# Altium PCB gainblock.PcbDoc
Units mil, origin at the board's own origin, x right, y up, seen from the top; angles counter-clockwise.
Board outline 1600.03 x 1875.03 mil, 2 copper layers (Top Layer, Bottom Layer); 15 components, 7 nets, 35 pads, 173 vias.
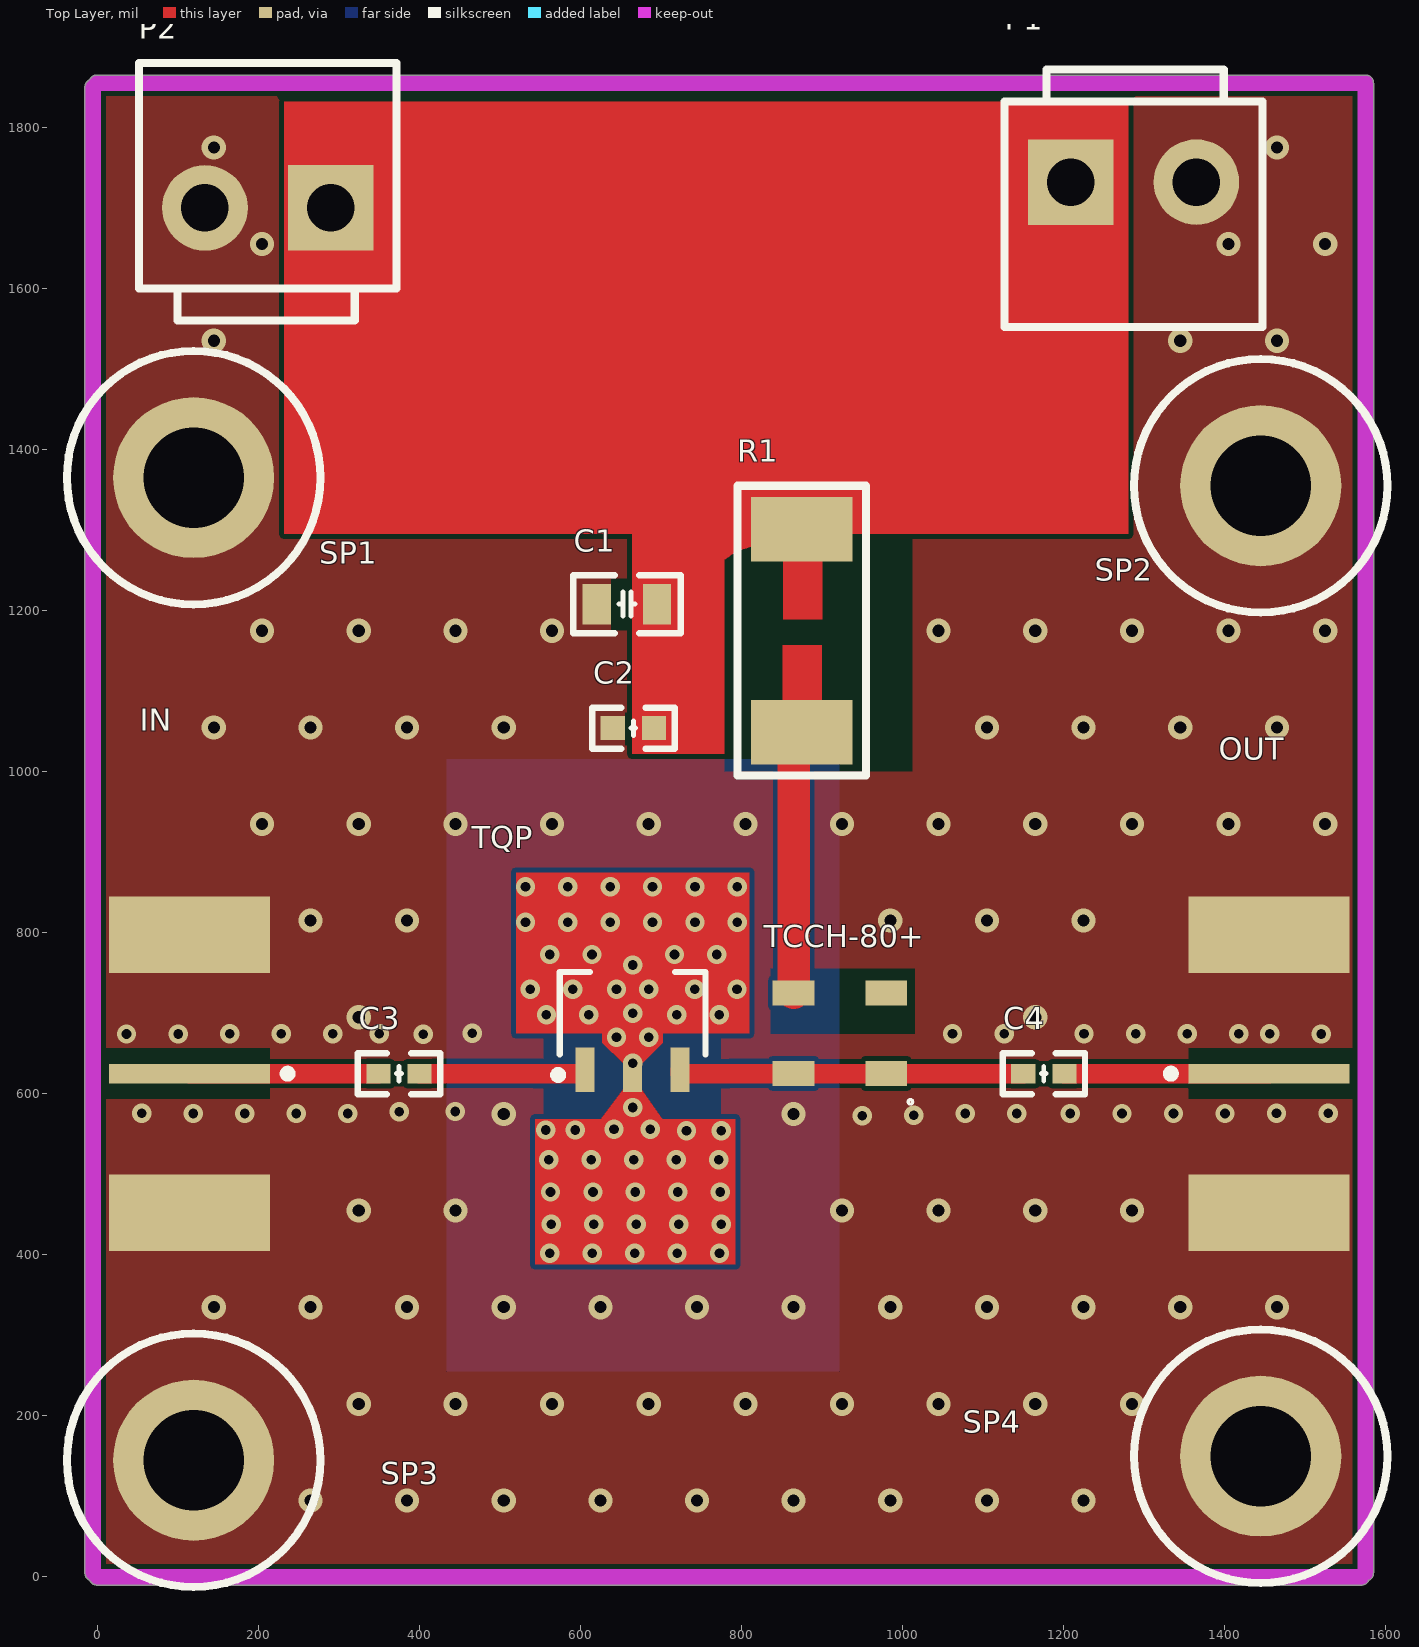
[diagram p0: Top Layer view]
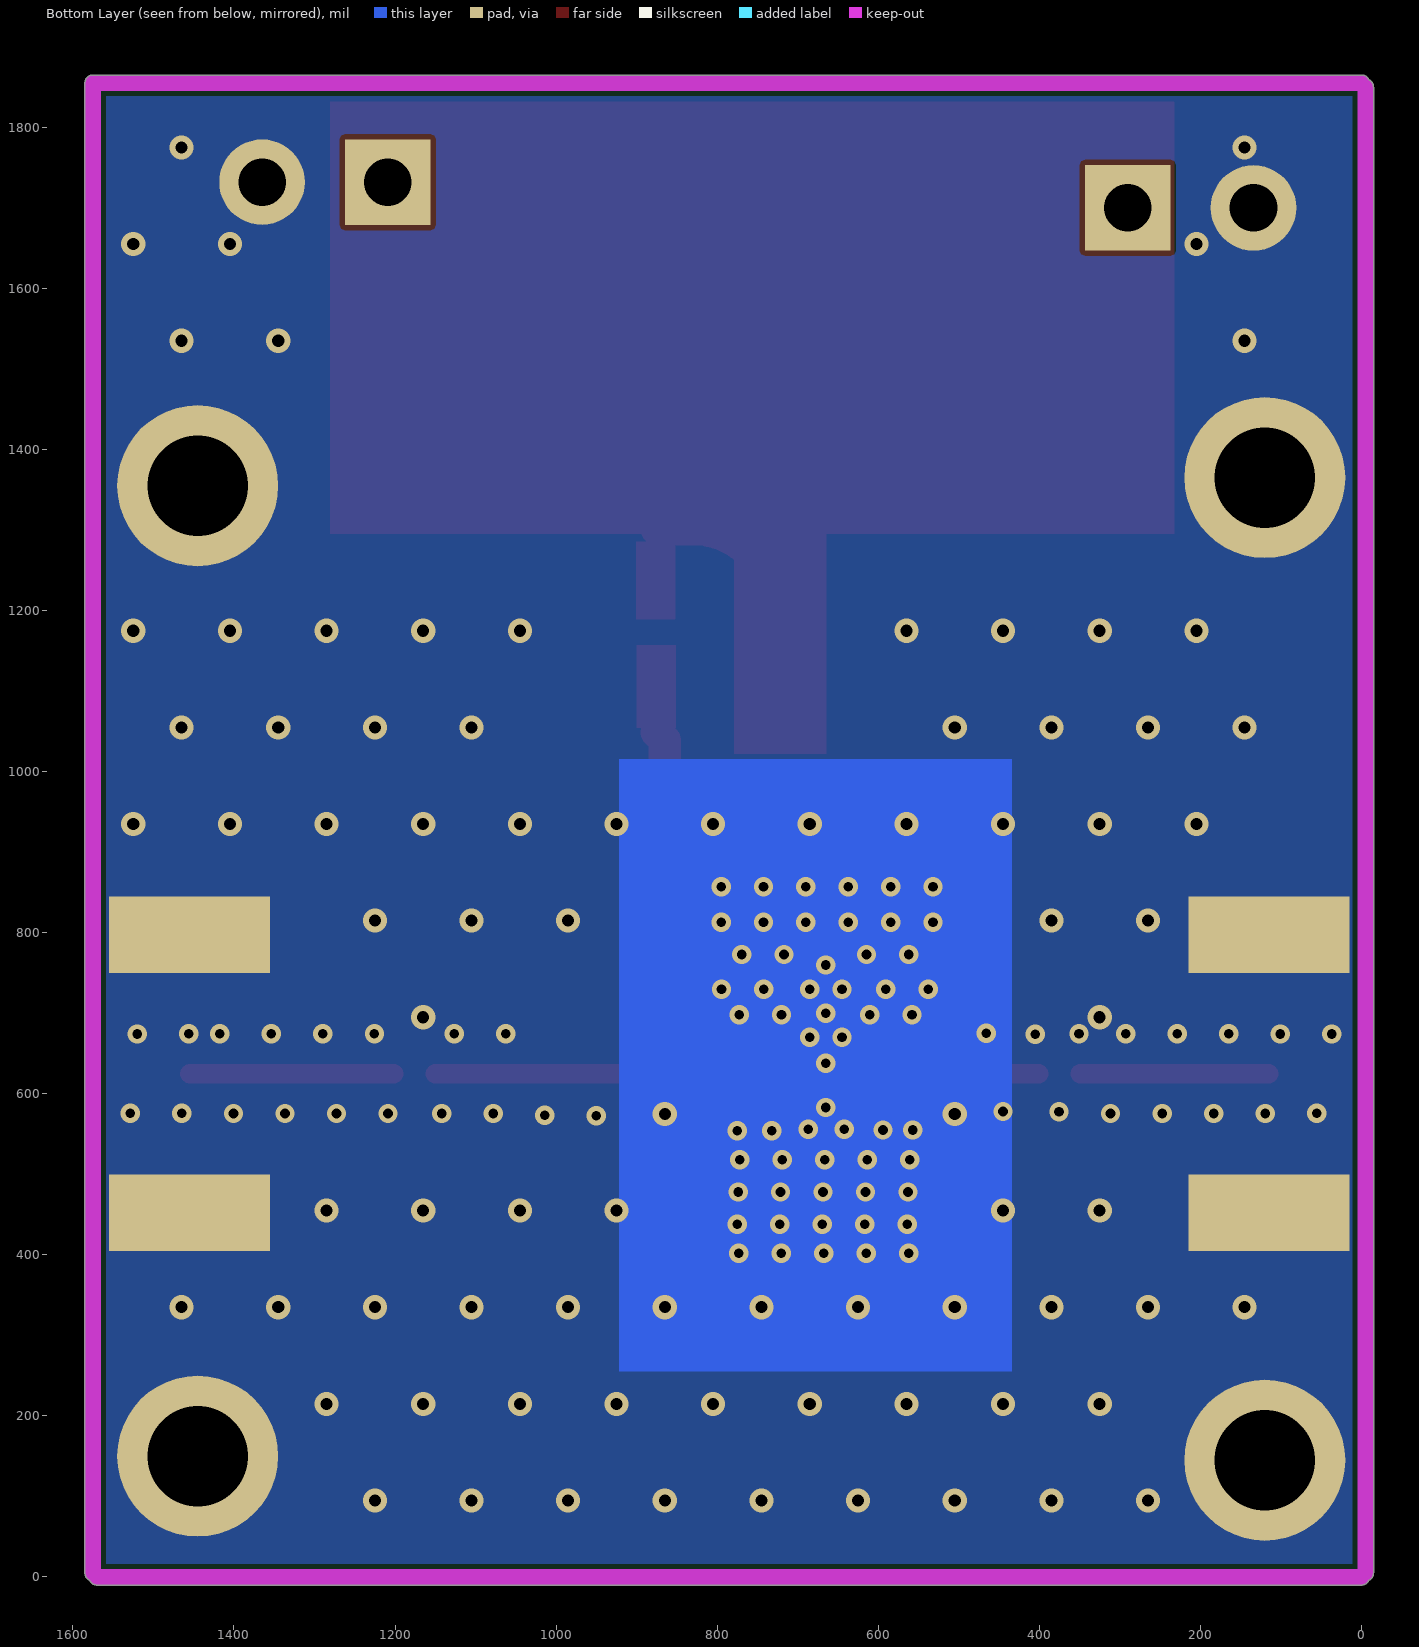
[diagram p1: Bottom Layer view, seen from below]
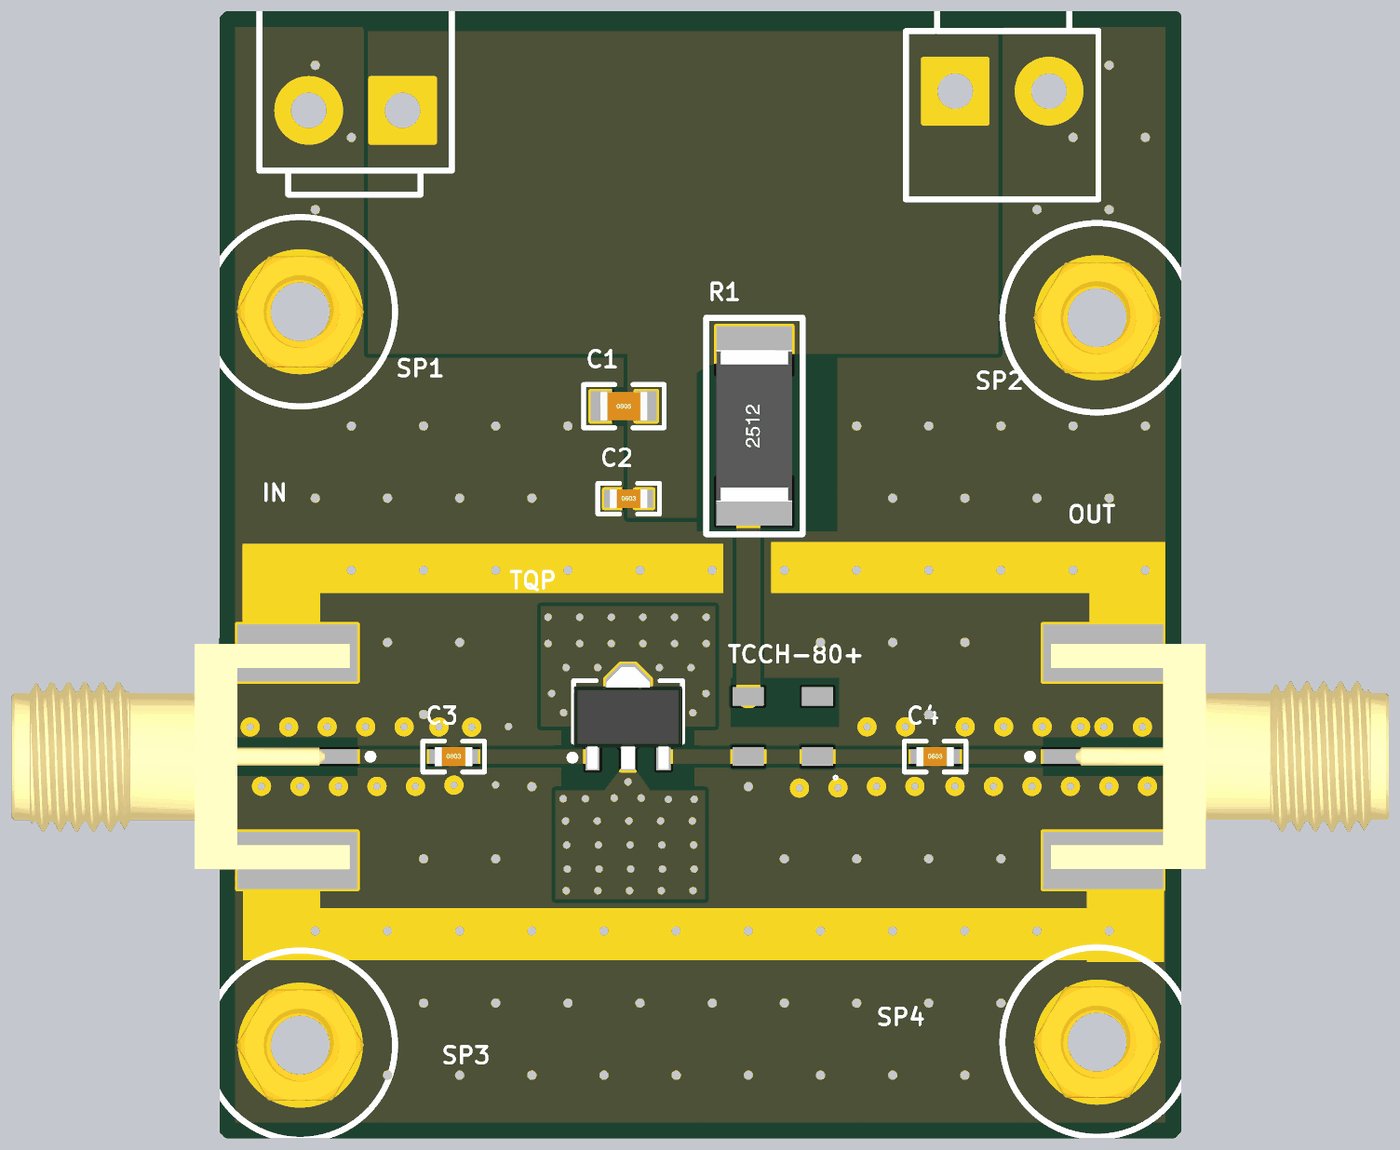
[diagram p2: 3D render of the assembled board from above, using the file's embedded part models]

## Layer stack, top to bottom
Top Solder: solder mask 0.4, Solder Resist, Dk 3.5
Top Layer: signal copper 1.4
Dielectric 1: dielectric 12.6, FR-4, Dk 4.8
Bottom Layer: signal copper 1.4
Bottom Solder: solder mask 0.4, Solder Resist, Dk 3.5

## Board outline
-9.13,-4.13 cw(c-5,5) -15.02,5 -15.02,1850 cw(c-5,1850) -9.13,1859.13 cw(c0,1855) 0,1865.01 1575,1865.01 cw(c1575,1855) 1585.01,1855 1585.01,5 cw(c1575,5) 1579.13,-4.13 cw(c1570,0) 1570,-10.01 0,-10.01 cw(c0,0)

## Design rules (kind name [scope] priority, off if disabled: settings)
Clearance [All] p1: gap=6 ignorepadtopadclearanceinfootprint=FALSE
PolygonConnect [All] p1: connectstyle=Direct reliefconductorwidth=10 reliefentries=4 polygonreliefangle="90 Angle" airgapwidth=10
RoutingVias [All] p1: holewidth=28 width=50 viastyle="Through Hole" minholewidth=28 minwidth=50 maxholewidth=28 maxwidth=50
SolderMaskExpansion [All] p1: expansion=4
Width [All] p1: maxlimit=100 minlimit=10 preferedwidth=10
30 further rules are at their usual default settings.

## Components (designator, comment, footprint, x,y, rotation, side; value= is the part's Value field where it differs from the comment)
C1 "104" "C 0805_L" 658,1208 r0 top
C2 "104" "C 0603_L"#1 666,1054 r0 top
C3 "104" "C 0603_L"#2 375,625 r0 top
C4 "104" "C 0603_L"#2 1175.59,625 r0 top
IN "142-0701-801" CINC-142-0701-801_V 115,625 r180 top
OUT "142-0701-801" CINC-142-0701-801_V 1455,624.99 r0 top
P1 "HDR-1X2" VH3.96-LI-2P 1287,1732 r0 top
P2 "HDR-1X2" VH3.96-LI-2P 212.05,1700 r180 top
R1 "1K" "R 2512_M" 875,1175 r90 top
SP1 "M3铜柱" M3x4_L 120,1365 r0 top
SP2 "M3铜柱" M3x4_L 1445,1355 r0 top
SP3 "M3铜柱" M3x4_L 120,145 r0 top
SP4 "M3铜柱" M3x4_L 1445,150 r0 top
TCCH-80+ "TCCH-80+" DFN3127P600-8N 840,740 r270 top
TQP "*TQP369182" "SOT89- TQP369182" 605.94,629.84 r90 top (schematic designator *TQP369182)

## Footprints (in the part's own frame and the unit in brackets; to place one, negate y for a bottom-side part, rotate by r counter-clockwise, add the part's x,y. Pads: shape width x height; smd on the part's side, far side on the other; paste and mask are expansions set on the pad)
"C 0603_L"#1 [mil] "无极性贴片电容"
  rect 30x30 smd: 1(-25.59,0) 2(25.59,0)
  silkscreen extent -51,-26 51,26, body extent -31,-16 31,16, height 32
"C 0603_L"#2 [mil] "无极性贴片电容"
  rect 30x24 smd: 1(-25.59,0) 2(25.59,0)
  silkscreen extent -51,-26 51,26, body extent -31,-16 31,16, height 32
"C 0805_L" [mil] "无极性贴片电容"
  rect 35x50 smd: 1(-37.4,0) 2(37.4,0)
  silkscreen extent -67,-36 67,36, body extent -39,-24 39,24, height 20
CINC-142-0701-801_V [mil] "SMA Connector, 5-Leads, Body 14.275x9.525mm"
  rect 200x24 smd: 1(0,0)
  rect 200x95 smd: 2(0,172.5) 3(0,-172.5)
  rect 200x95 smd far side: 4(0,172.5) 5(0,-172.5)
  silkscreen extent -127,-5 -117,5, body extent -87,-187 475,188, height 171
DFN3127P600-8N [mm]
  rect 0.79x1.32 smd: 1(2.921,3.556) 2(0.381,3.556) 3(0.381,0.635) 4(2.921,0.635)
  silkscreen extent 3.74,4.25 3.88,4.39, body extent -0.17,0.21 3.72,4.1, height 3.81
M3x4_L [mil] "M3铜柱，长：4mm"
  round 200 hole 125: 1(0,0)
  silkscreen extent -157,-157 157,157, body extent -106,-93 106,93, height 159
"R 2512_M" [mm] "1W贴片电阻"
  rect 2.032x3.2 smd: 1(-3.2,0) 2(3.2,0)
  silkscreen extent -4.57,-2.03 4.57,2.03, body extent -3.2,-1.6 3.2,1.6, height 0.55
"SOT89- TQP369182" [mm] "SOT89, TQP369182"
  rect 1.4x0.6 smd: 1(0,0) 3(0,-3)
  rect 0.9x0.6 smd: 2(-0.25,-1.5)
  Top Layer region: 0.2,-1.2 0.85,-0.55 3.15,-0.55 3.8,-1.2 3.8,-1.8 3.15,-2.45 0.85,-2.45 0.2,-1.8
  silkscreen extent -0.29,-3.8 3.08,0.97, body extent -0.65,-3.8 3.65,0.8, height 1.6
VH3.96-LI-2P [mm] "接插件，25V/5A"
  rect 2.7x2.7 hole 1.5: 1(-1.98,0)
  round 2.7 hole 1.5: 2(1.982,0)
  silkscreen extent -4.06,-4.57 4.07,3.56, body extent -3.98,-4.4 4.03,4.16, height 10.5

## Part data
C1 C2 C3 C4: library part C, "无极性贴片电容", BOM名称=无极性贴片电容, 学习资源=www.ooocke.com, 版权归属=源创客
IN OUT: library part CMP-2000-05490-1, "SMA End Launch Jack Receptacle, 50 Ohm, 0 to 18 GHz, -65 to 165 degC, 5-Pin SMD, RoHS, Bulk", Manufacturer=EmersonConnectivitySolutions, Maximum Frequency=18GHz, Operating Temperature Range=-65Cto+165C, Package Description="5-Pin Surface Mount Device, Body 14.275 x 9.525 mm", Body Material=Brass, Body Style=Straight, Brand=Johnson/EmersonConnectivitySolutions, Connector Type=JackPCB, Contact Plating=Gold, Datasheet URL=https://belfuse.com/resources/Johnson/productinformation/pi-142-0701-801.pdf, Datasheet Version=12/2014, Factory Pack Quantity=5, Gender=Jack(Female), Impedance=50Ohms, Manufacturer URL=http://www.cinch.com/, Mounting Technology=SurfaceMount, Orientation=Straight, Package Reference=142-0701-801, Package URL=https://belfuse.com/resources/Johnson/drawings/dr-1420701801.pdf, Product=Connectors, Product Category=RFConnectors/CoaxialConnectors, RF Series=SMA, RoHS=Details, Series=SMA, Termination Style=Solder
P1 P2: library part "Header 2", "2P接插件", BOM名称=2P接插件, 学习资源=www.ooocke.com, 版权归属=源创客
R1: library part R, "贴片电阻", BOM名称=贴片电阻, 学习资源=www.ooocke.com, 版权归属=源创客
SP1 SP2 SP3 SP4: library part 铜柱小焊盘, "铜柱", BOM名称=铜柱, 学习资源=www.ooocke.com, 版权归属=源创客
TCCH-80+: library part Component_1
TQP: library part TQP369182, "TQP369182"

## Via types
v1: diameter 30, hole 15, Top Layer to Bottom Layer, tented both sides, 82 vias
v2: diameter 24, hole 12, Top Layer to Bottom Layer, tented both sides, 60 vias
v3: diameter 24, hole 12, Top Layer to Bottom Layer, 31 vias

## Nets (pads, with @x,y where several pads share a name; then routed paths per layer and width w, separated by ;. In a path a pad name is that pad's centre, name@x,y a point inside that pad or via, vN(x,y) a via of type N, cw(c..) or ccw(c..) an arc to the next point about the centre after c; other vN are vias at no path point)
GND: C1.1 C2.1 IN.2 IN.3 IN.4 IN.5 OUT.2 OUT.3 OUT.4 OUT.5 P1.2 P2.2 SP1.1 SP2.1 SP3.1 SP4.1 TQP.2
  other v1: 265,95 385,95 505,95 625,95 745,95 865,95 985,95 1105,95 1225,95 325,215 445,215 565,215 685,215 805,215 925,215 1045,215 1165,215 1285,215 145,335 265,335 385,335 505,335 625,335 745,335 865,335 985,335 1105,335 1225,335 1345,335 1465,335 325,455 445,455 925,455 1045,455 1165,455 1285,455 505,575 865,575 325,695 1165,695 265,815 385,815 985,815 1105,815 1225,815 205,935 325,935 445,935 565,935 685,935 805,935 925,935 1045,935 1165,935 1285,935 1405,935 1525,935 145,1055 265,1055 385,1055 505,1055 1105,1055 1225,1055 1345,1055 1465,1055 205,1175 325,1175 445,1175 565,1175 1045,1175 1165,1175 1285,1175 1405,1175 1525,1175 145,1535 1345,1535 1465,1535 205,1655 1405,1655 1525,1655 145,1775 1465,1775
  other v2: 562,402 614.75,402 667.5,402 720.25,402 773,402 564,438 616.75,438 669.5,438 722.25,438 775,438 563,478 615.75,478 668.5,478 721.25,478 774,478 561,518 613.75,518 666.5,518 719.25,518 772,518 732,554 775,554 557,555 594,555 642,556 686.84,556 445,578 665,583 665,637.72 645,670 685,670 466,675 558,698 610.6,698 720,698 772.6,698 665,700 538,730 590.6,730 645,730 685,730 742,730 794.6,730 665,760 562,773 614.6,773 717,773 769.6,773 532,813 584.6,813 637.2,813 689.8,813 742.4,813 795,813 532,857 584.6,857 637.2,857 689.8,857 742.4,857 795,857
  other v3: 950.04,572.65 1014.04,573.19 119.49,575.44 183.49,575.44 247.49,575.44 311.49,575.44 1078,575.45 1142,575.45 1208.61,575.45 1272.61,575.45 1336.61,575.45 1400.61,575.45 55.49,575.68 1464.61,575.67 1528.61,575.67 375.46,577.53 36.65,674.32 100.65,674.32 350.61,674.39 405,674 1456.21,674.39 1520.21,674.31 164.65,674.55 228.65,674.55 292.65,674.55 1062.33,674.55 1126.33,674.55 1225.57,674.55 1289.57,674.55 1353.57,674.55 1417.57,674.55
Net*TQP369182_1: C3.2 TQP.1 | length 175.4
  Top Layer w24: C3.2 576,625
Net*TQP369182_3: C4.1 TCCH-80+.1 TCCH-80+.4 TQP.3 | length 430.8
  Top Layer w24: TQP.3 724.06,625 TCCH-80+.4 TCCH-80+.1 C4.1
NetC3_1: C3.1 IN.1 | length 234.4
  Top Layer w24: IN.1 C3.1
NetC4_2: C4.2 OUT.1 | length 253.8
  Top Layer w24: C4.2 OUT.1
NetR1_1: R1.1 TCCH-80+.3 | length 328.2
  Top Layer w40: TCCH-80+.3 865,1039.03 R1.1
VCC: C1.2 C2.2 P1.1 P2.1 R1.2 | length 368.8
  Top Layer w40: C2.2 691.59,1198.8 cw(c704.6,1198.8) C1.2 759.1,1271.7 cw(c829.81,1200.98) 829.81,1300.98 R1.2
pads on no net: TCCH-80+.2

## Polygon pours and split planes (outlines as drawn)
GND on Bottom Layer "Top Layer-GND" (solid, pour order 2): -5,1850 1575,1850 1575,5 0,5 0,0
GND on Top Layer "Top Layer-GND" (solid, pour order 6): -5,1850 -5,5 1575,5 1575,1849 1569,1849

## Keep-outs
Keep-Out Layer:
  lines w20: -5,5 0,0 1570,0 1575,5 1575,1855 0,1855 -5,1850 -5,5

## Other copper
Top Layer:
  rectangle net NetR1_1: 851,1054 900,1157
  rectangle net VCC: 852,1189 901,1286
  rectangle net VCC: 664,1022 779,1372
  rectangle net VCC: 232,1295 1281,1832
  rectangle net GND: 544,388 793,569
  rectangle net GND: 636,515 693,575
  region net GND: 675.62,600.62 658.89,613.23 625.27,568.61 642,556
  region net GND: 686.84,553.98 704,566 671.96,611.76 654.79,599.74
  rectangle net GND: 653,547 677,605
  rectangle net Net*TQP369182_3: 731,613 785,637
  rectangle net Net*TQP369182_1: 542,613 595,637
  rectangle net GND: 520,675 810,875
  pour cut-out: 1355,657 1355,593 1559,593 1559,657
  pour cut-out: 11,657 11,593 215,593 215,657
  pour cut-out: 779,1322 1013,1322 1013,1000 779,1000
  pour cut-out: 655,1074 676,1074 676,1032 655,1032
  pour cut-out: 638,1240 670,1240 670,1175 638,1175
  pour cut-out: 1165,641 1187,641 1187,609 1165,609
  pour cut-out: 836,756 1016,756 1016,674 836,674
  pour cut-out: 554,675 554,569 775,569 775,675
  pour cut-out: 364,641 364,609 386,609 386,641
Bottom Layer:
  rectangle net GND: 434,255 922,1016
  rectangle net GND: 450,315 883,984

## Silkscreen, mask and mechanical layers (free items; w line width, h text height)
Top Solder:
  rectangle: 1428,283 1556,431
  rectangle: 25,286 153,444
  rectangle: 28,286 1549,373
  rectangle: 24,789 153,912
  rectangle: 1432,814 1559,934
  rectangle: 903,897 1559,982
  rectangle: 24,897 823,979
Bottom Solder:
  rectangle: 1349,402 1558,504
  rectangle: 11,748 218,849
Mechanical 1:
  lines w20: -5,5 0,10 0,1855 1575,1855 1575,5 1570,0 0,0